# EAGLE board Granny Safe2 (EAGLE 8.4.0)
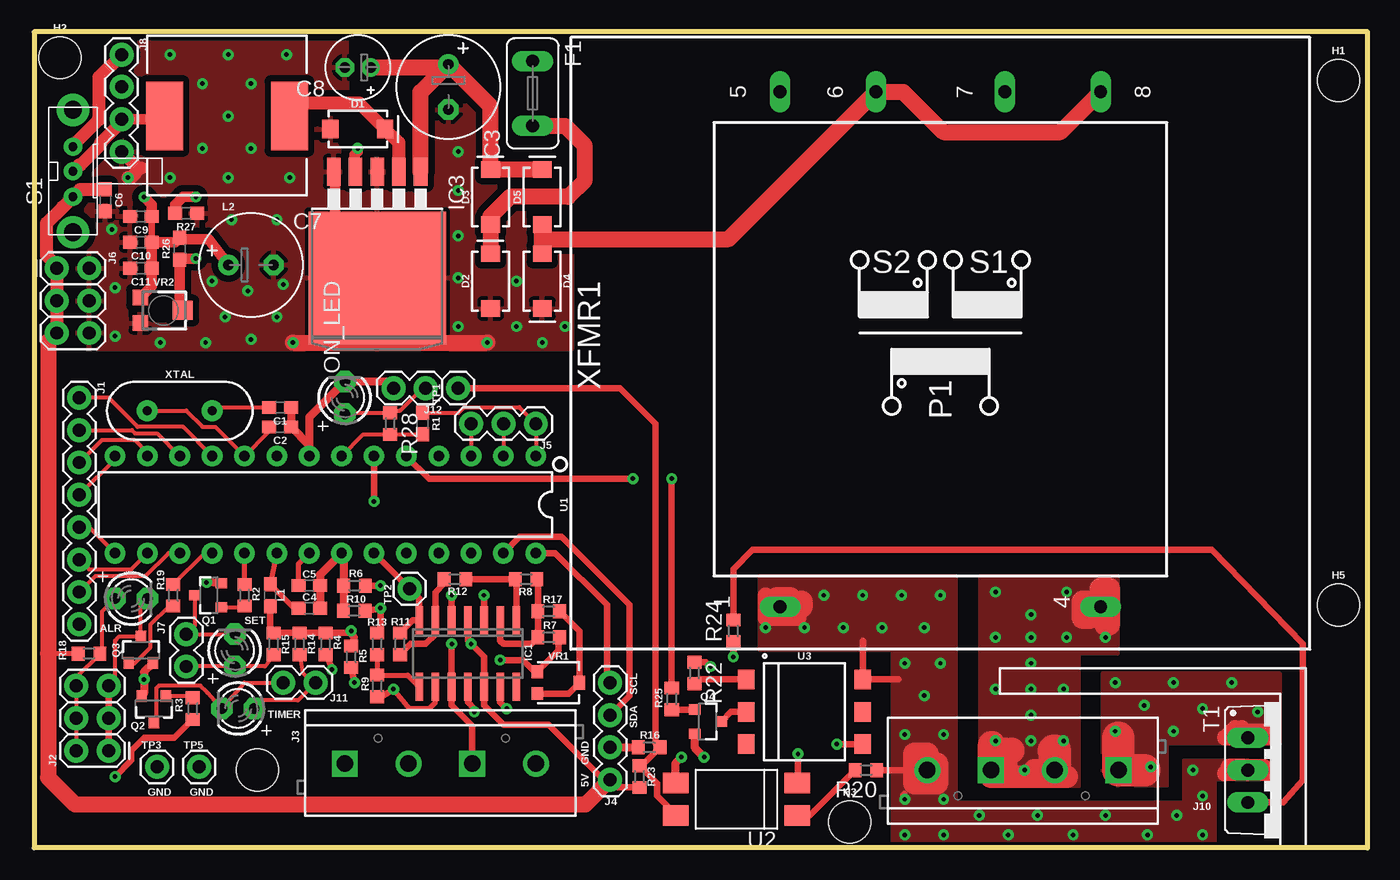
[diagram p0: board, top side]
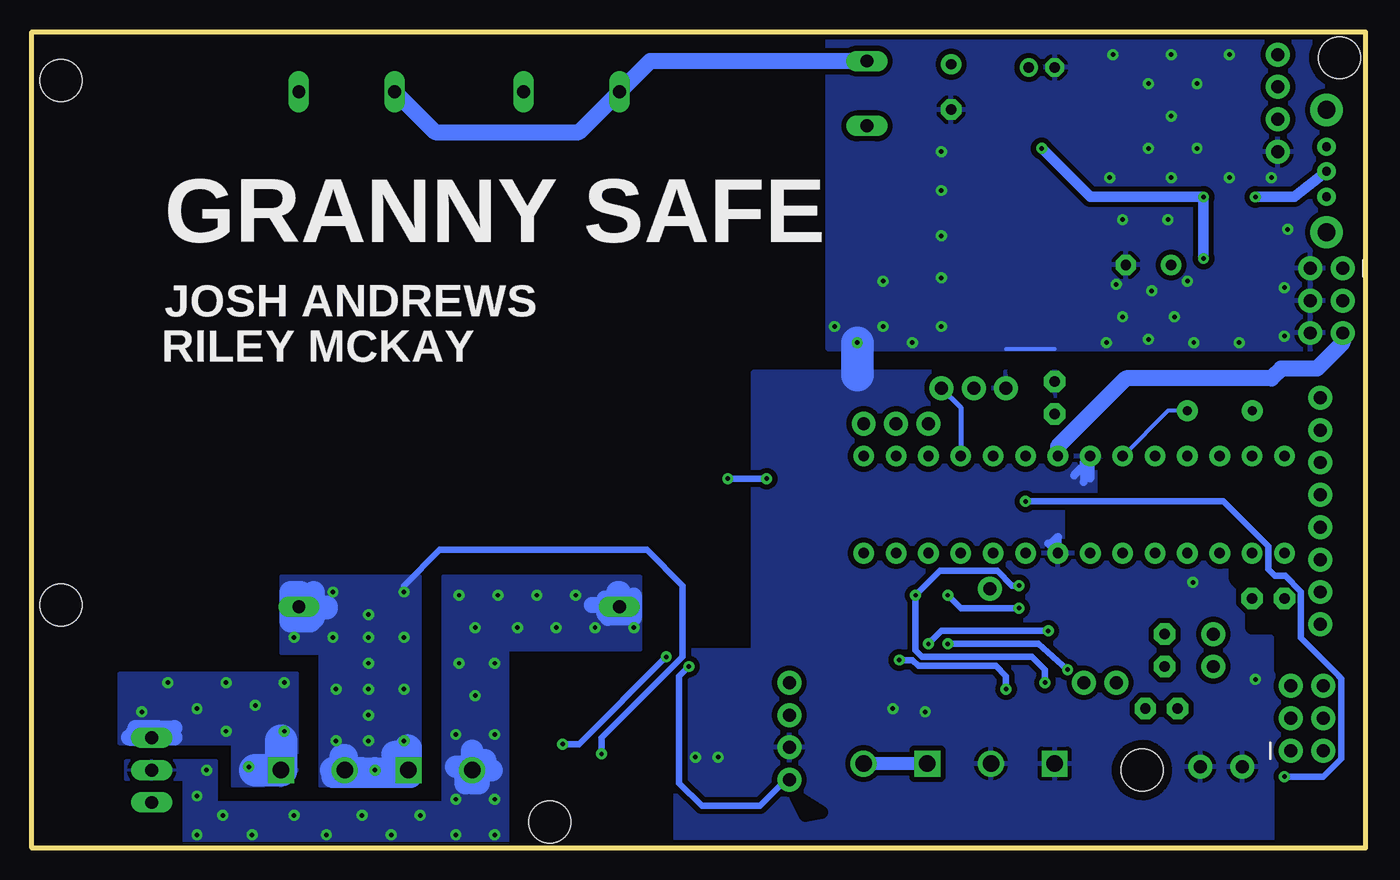
[diagram p1: board, bottom side, seen from below]

Size 104.65 x 64.01 mm. Coordinates in mm from the lower left corner, seen from the top.
Outline: 0,64.01 0,0 104.65,0 104.65,64.01 0,64.01
Copper layers (1*16): Top 0.035mm / dielectric 1.5mm / Bottom 0.035mm
Design rules "SparkFun *": minimum track width 8mil, minimum drill 20mil, track to track 8mil, track to pad 8mil, pad to pad 8mil, via to via 8mil, smd to smd 8mil, copper to edge 10mil, drill to drill 8mil, minimum pad ring 12mil, minimum via ring 10mil, stop-mask expansion 4mil, vias tented up to drill 15mil, thermal gap 12mil
tRestrict: area 25.4,56.4 to 29.2,60.5; area 25.4,61.7 to 30.5,63.2; area 9.4,41.9 to 10.4,45.5; area 8.4,48.5 to 8.6,48.8; area 32,59.2 to 33,59.9; area 26.4,54.9 to 27.4,55.1; area 24.4,55.1 to 24.6,56.6
bRestrict: area 27.7,17.8 to 28.2,18; area 28.4,17.8 to 32.3,18; area 32.3,17 to 34.5,20.3; area 9.4,24.4 to 22.9,26.4; area 4.8,23.4 to 20.3,30; area 14.5,31.2 to 21.6,35.6; area 24.9,32 to 31,37.3; area 20.1,34.5 to 23.1,37.3; area 6.1,3 to 6.6,4.8; area 3.8,13.5 to 8.9,18.3; area 7.4,20.3 to 10.2,22.6; area 42.7,2.5 to 44.7,4.1; 1 more areas

## Footprints (pad centres in the part's own frame; a part is rotated, then mirrored left to right if it is on the bottom)
LED3MM = drill 0.813 pad 1.676 octagon: A -1.27,0; K 1.27,0
0603 = smd 1.1 x 1: 1 -0.85,0; 2 0.85,0
E3,5-8 = drill 0.813 pad 1.6: + -1.778,0 | drill 0.813 pad 1.6 octagon: - 1.778,0
E2-5 = drill 0.813 pad 1.422: + -1.016,0 | drill 0.813 pad 1.422 octagon: - 1.016,0
SMA-DIODE = smd 1.27 x 1.47: A -2.15,0; C 2.15,0
TE5 = drill 1.016 long: 1 -2.54,0; 2 2.54,0
STAND-OFF = hole 3.302: 0,0
SO14 = smd 0.6 x 2.2: 1 -3.81,-2.6; 2 -2.54,-2.6; 3 -1.27,-2.6; 4 0,-2.6; 5 1.27,-2.6; 6 2.54,-2.6; 7 3.81,-2.6; 8 3.81,2.6; 9 2.54,2.6; 10 1.27,2.6; 11 0,2.6; 12 -1.27,2.6; 13 -2.54,2.6; 14 -3.81,2.6
TO263-5 = smd 1.067 x 2.159: 1 -3.404,-5.791; 2 -1.702,-5.791; 3 0,-5.791; 4 1.702,-5.791; 5 3.404,-5.791 | smd 10.8 x 10.41: 6 0,2.54
1X08 = drill 1.016 pad 1.88: 1 0,0; 2 2.54,0; 3 5.08,0; 4 7.62,0; 5 10.16,0; 6 12.7,0; 7 15.24,0; 8 17.78,0
2X3 = drill 1.016 pad 1.88: 1 0,0; 2 0,2.54; 3 2.54,0; 4 2.54,2.54; 5 5.08,0; 6 5.08,2.54
SCREWTERMINAL-5MM-2 = drill 1.3 pad 2.032 square: 1 0,0; 3 10,0 | drill 1.3 pad 2.032: 2 5,0; 4 15,0
1X04 = drill 1.016 pad 1.88: 1 0,0; 2 2.54,0; 3 5.08,0; 4 7.62,0
1X03 = drill 1.016 pad 1.88: 1 0,0; 2 2.54,0; 3 5.08,0
1X02 = drill 1.016 pad 1.88: 1 0,0; 2 2.54,0
CR75 = smd 2.9 x 5.4: P$1 -4.8,0; P$2 5,0
SOT23-3 = smd 0.8 x 0.9: 1 -0.95,-1; 2 0.95,-1; 3 0,1.1
R0603 = smd 1 x 1.1: 1 -0.85,0; 2 0.85,0
EG1213 = drill 0.7 pad 1.422: 1 -2,0; 2 0,0; 3 1.9,0 | drill 1.4 pad 2.54: MT1 -4.8,0; MT2 4.8,0
TO220BV = drill 1.016 long: G 2.54,-2.54; T1 -2.54,-2.54; T2 0,-2.54
1X01 = drill 1.016 pad 1.88: 1 0,0
DIP28 = drill 0.813 pad 1.626: 1 -16.51,-3.81; 2 -13.97,-3.81; 3 -11.43,-3.81; 4 -8.89,-3.81; 5 -6.35,-3.81; 6 -3.81,-3.81; 7 -1.27,-3.81; 8 1.27,-3.81; 9 3.81,-3.81; 10 6.35,-3.81; 11 8.89,-3.81; 12 11.43,-3.81; 13 13.97,-3.81; 14 16.51,-3.81; 15 16.51,3.81; 16 13.97,3.81; 17 11.43,3.81; 18 8.89,3.81; 19 6.35,3.81; 20 3.81,3.81; 21 1.27,3.81; 22 -1.27,3.81; 23 -3.81,3.81; 24 -6.35,3.81; 25 -8.89,3.81; 26 -11.43,3.81; 27 -13.97,3.81; 28 -16.51,3.81
DIL4-SMD = smd 1.6 x 2: 1 -1.27,-4.77; 2 1.27,-4.77; 3 1.27,4.77; 4 -1.27,4.77
DIP8SMD = smd 1.524 x 1.27: 1 -2.54,-4.572; 2 0,-4.572; 3 2.54,-4.572; 4 2.54,4.572; 5 0,4.572; 6 -2.54,4.572
TRIMPOT-SMD-3MM-CLOSED = smd 1 x 0.9: 1 -0.85,-1.65; 3 0.85,-1.65 | smd 1.1 x 0.9: 2 0,1.65
TRIMPOT-SMD-TC33X = smd 1.2 x 1.2: 1 -1,-1.825; 3 1,-1.825 | smd 1.5 x 1.6: 2 0,1.5
EE20-2 = drill 1.016 long: 1 -17.653,12.573; 4 -17.653,-12.573; 5 22.733,12.573; 6 22.733,5.055; 7 22.733,-5.055; 8 22.733,-12.573
HC49US = drill 0.7 pad 1.651: 1 -2.54,0; 2 2.54,0

## Placement (x,y rotation side)
ALR_LED  [LED3MM]  7.62,19.56 0 top
C1  22pF  [0603]  19.3,34.54 180 top
C2  22pF  [0603]  19.3,33.02 180 top
C3  470u  [E3,5-8]  32.51,59.69 270 top
C4  0.1uF  [0603]  21.59,18.8 0 top
C5  0.1uF  [0603]  21.59,20.57 0 top
C6  0.1uF  [0603]  5.59,50.8 270 top
C7  470u  [E3,5-8]  17.02,45.72 0 top
C8  100u  [E2-5]  25.4,61.21 180 top
C9  0.1uF  [0603]  8.38,49.53 180 top
C10  100pF  [0603]  8.38,47.5 180 top
C11  1nF  [0603]  8.38,45.47 180 top
D1  [SMA-DIODE]  25.4,56.39 0 top
D2  [SMA-DIODE]  35.81,44.45 90 top
D3  [SMA-DIODE]  35.81,51.05 90 top
D4  [SMA-DIODE]  39.88,44.45 270 top
D5  [SMA-DIODE]  39.88,51.05 90 top
F1  1.5A  [TE5]  39.12,59.18 270 top
H1  STAND-OFF  [STAND-OFF]  102.36,60.2 0 top
H2  STAND-OFF  [STAND-OFF]  2.03,61.98 0 top
H3  STAND-OFF  [STAND-OFF]  64.01,2.03 0 top
H4  STAND-OFF  [STAND-OFF]  17.53,6.1 0 top
H5  STAND-OFF  [STAND-OFF]  102.36,19.05 0 top
IC1  MCP604SL  [SO14]  34.04,15.24 180 top
IC3  [TO263-5]  26.92,47.24 180 top
J1  3x4 Keypad  [1X08]  3.56,35.31 270 top
J2  FEMALE 2x3  [2X3]  5.84,7.62 90 top
J3  SCREW-4  [SCREWTERMINAL-5MM-2]  24.38,6.6 0 top
J4  i2c_16x2  [1X04]  45.21,5.33 90 top
J5  [1X03]  39.37,33.27 180 top
J6  FEMALE 2x3  [2X3]  1.78,45.47 270 top
J7  [1X02]  11.94,14.22 90 top
J8  RES JUMPER  [1X04]  6.86,62.23 270 top
J10  SCREW-4  [SCREWTERMINAL-5MM-2]  85.09,6.1 180 top
J11  [1X02]  22.1,12.95 180 top
J12  [1X02]  30.73,36.07 180 top
L1  10uH  [0603]  18.54,19.81 90 top
L2  INDUCTOR  [CR75]  15.24,57.4 180 top
ON_LED  [LED3MM]  24.38,35.31 90 top
Q1  [SOT23-3]  13.72,19.81 90 top
Q2  [SOT23-3]  9.4,10.92 180 top
Q3  [SOT23-3]  8.38,15.49 0 top
Q4  2N3904  [SOT23-3]  52.83,9.91 270 top
R1  10k  [0603]  30.48,33.27 270 top
R2  2k  [R0603]  16.51,19.81 270 top
R3  2k  [R0603]  12.45,10.92 90 top
R4  2.4k  [R0603]  22.86,16 90 top
R5  2.4k  [R0603]  24.89,14.99 90 top
R6  100  [R0603]  25.15,20.57 0 top
R7  10k  [R0603]  40.39,16.51 180 top
R8  20k  [R0603]  38.61,21.08 180 top
R9  20k  [R0603]  26.92,12.7 270 top
R10  15k  [R0603]  25.12,18.59 0 top
R11  15k  [R0603]  28.7,16 90 top
R12  3k  [R0603]  33.02,21.08 180 top
R13  3k  [R0603]  26.92,16 90 top
R14  150  [R0603]  20.83,16 90 top
R15  150  [R0603]  18.8,16 90 top
R16  1M  [R0603]  48.26,7.87 0 top
R17  5k  [R0603]  40.39,18.54 0 top
R18  150  [R0603]  4.32,15.24 180 top
R19  2k  [R0603]  10.92,19.81 270 top
R20  10k  [R0603]  65.28,6.1 180 top
R22  220  [R0603]  51.82,13.72 270 top
R23  10k  [R0603]  47.5,5.59 270 top
R24  180  [R0603]  54.86,17.02 90 top
R25  2k  [R0603]  50.04,11.68 270 top
R26  3.3k  [0603]  11.43,46.99 90 top
R27  1k  [0603]  11.94,49.78 180 top
R28  150  [R0603]  27.94,33.27 270 top
S1  EG1213  [EG1213]  3.05,53.09 90 top
SET_LED  [LED3MM]  15.75,15.49 90 top
T1  BT137  [TO220BV]  97.79,6.1 270 top
TIM_LED  [LED3MM]  16,10.92 180 top
TP1  [1X01]  33.27,36.07 90 top
TP2  [1X01]  29.46,20.32 90 top
TP3  [1X01]  9.65,6.35 0 top
TP5  [1X01]  12.95,6.35 0 top
U1  328P  [DIP28]  22.86,26.92 180 top
U2  SFH6206  [DIL4-SMD]  55.12,3.81 90 top
U3  MOC3051  [DIP8SMD]  60.45,10.67 270 top
VR1  10k  [TRIMPOT-SMD-3MM-CLOSED]  41.15,12.95 270 top
VR2  10k  [TRIMPOT-SMD-TC33X]  10.16,42.16 270 top
XFMR1  EE20-2  [EE20-2]  71.12,36.58 90 top
XTAL  16MHz  [HC49US]  11.43,34.29 0 top

## Library data of the parts
ALR_LED C3 C7 C8 ON_LED R2 R3 R14 R15 R18-R20 R22-R25 R28 S1 SET_LED TIM_LED = adafruit
C1 C2 = SparkFun-Capacitors; PROD_ID: CAP-07876
C4-C6 = SparkFun-Capacitors; PROD_ID: CAP-00810
C9 = SparkFun-Capacitors; PROD_ID: CAP-08604
C10 = SparkFun-Capacitors; PROD_ID: CAP-07883
C11 = SparkFun-Capacitors; PROD_ID: CAP-07886
D1-D5 = SparkFun-DiscreteSemi; PROD_ID: DIO-09886
F1 = fuse; OC_FARNELL: unknown; OC_NEWARK: unknown
H1-H5 = SparkFun-Hardware
IC1 IC3 = linear
J1 = SparkFun-Connectors; PROD_ID: CONN-08438
J2 J6 = SparkFun-Connectors; PROD_ID: CONN-11566
J3 J10 L2 T1 U3 XFMR1 = ece
J4 J8 = SparkFun-Connectors; PROD_ID: CONN-09696
J5 J7 J11 J12 TP1-TP3 TP5 = SparkFun-Connectors
L1 = SparkFun-Coils; PROD_ID: NDUC-07874
Q1-Q4 = SparkFun-DiscreteSemi; PROD_ID: TRANS-09116
R1 = SparkFun-Resistors; PROD_ID: RES-00824
R4-R13 R16 R17 = resistor
R26 = SparkFun-Resistors; PROD_ID: RES-07851
R27 = SparkFun-Resistors; PROD_ID: RES-07856
U1 = SparkFun-IC-Microcontroller; PROD_ID: IC-09136
U2 = optocoupler; MF: VISHAY/TELEFUNKEN; MPN: SFH6206-3; OC_FARNELL: 1469585; OC_NEWARK: 58K2214
VR1 = SparkFun-Resistors; PROD_ID: RES-09285
VR2 = SparkFun-Resistors; PROD_ID: RES-12428
XTAL = SparkFun-Clocks; PROD_ID: XTAL-08181; SF_ID: COM-00536

## Nets
5V: C6.1 IC1.4 IC1.12 J4.1 J6.1 J6.3 J6.5 L1.1 R1.2 R4.2 R5.2 R14.2 R15.2 R18.2 R22.1 R23.2 R28.2 S1.1 U1.7
ADC0: IC1.7 R11.2 TP2.1 U1.23
ALR: R19.1 U1.18
GATE: R25.1 U1.5
GND: C1.1 C2.1 C3.- C4.2 C5.2 C6.2 C7.- C8.- C9.2 C10.2 C11.2 D1.A D2.A D4.C IC1.11 IC1.13 IC3.3 IC3.5 IC3.6 J3.1 J3.2 J4.2 J6.2 J6.4 J6.6 J8.4 J12.2 ON_LED.K Q1.2 Q2.2 Q3.2 Q4.2 R6.1 R10.1 R16.1 R27.1 TP3.1 TP5.1 U1.8 U1.22 U2.3 VR2.3
LINE: J10.4 R20.1 T1.T2 U3.6 XFMR1.1
N$1: C1.2 U1.9 XTAL.2
N$2: C2.2 U1.10 XTAL.1
N$3: J1.7 U1.17
N$4: J8.1 S1.3
N$5: C5.1 U1.21
N$6: J1.6 U1.16
N$7: J1.5 U1.15
N$8: J1.4 U1.14
N$9: J1.3 U1.13
N$10: J1.2 U1.12
N$11: J1.1 U1.11
N$12: Q1.1 R2.2
N$13: IC1.10 J3.3 J3.4 R4.1
N$14: Q2.1 R3.2
N$15: IC1.3 R5.1 R6.2
N$16: IC1.1 R8.2 R12.1
N$17: J7.1 R15.1 SET_LED.A
N$18: J11.1 R14.1 TIM_LED.A
N$19: J11.2 Q2.3 TIM_LED.K
N$20: J7.2 Q1.3 SET_LED.K
N$21: R17.2 VR1.2 VR1.3
N$22: D2.C D3.A F1.2
N$23: ALR_LED.K J2.1 J2.3 J2.5 Q3.3
N$24: IC1.2 R7.2 R8.1 R17.1
N$25: IC1.8 R9.1 R13.1
N$26: IC1.9 R7.1 R9.2 VR1.1
N$27: IC1.5 R10.2 R13.2
N$28: IC1.6 R11.1 R12.2
N$29: R20.2 U2.1
N$30: R24.2 T1.G
N$31: R22.2 U3.1
N$32: R24.1 U3.4
N$33: IC3.4 R26.1 R27.2 VR2.2
N$34: Q4.3 U3.2
N$35: Q4.1 R25.2
N$36: J12.1 ON_LED.A R28.1
N$37: F1.1 XFMR1.5 XFMR1.7
N$38: C7.+ C9.1 C10.1 C11.1 J8.3 L2.P$2 R26.2 S1.2 VR2.1
N$39: ALR_LED.A J2.2 J2.4 J2.6 R18.1
N$40: Q3.1 R19.2
N$41: D4.A D5.A XFMR1.6 XFMR1.8
N$43: C4.1 L1.2 U1.20
N$46: D1.C IC3.2 L2.P$1
N$51: C3.+ C8.+ D3.C D5.C IC3.1
NEUT: J10.2 J10.3 U2.2 XFMR1.4
PWR: J10.1 T1.T1
RST: J5.1 R1.1 U1.1
RX: J5.2 U1.2
SCL: J4.4 U1.28
SDA: J4.3 U1.27
SET: R2.1 U1.19
T_EN: R3.1 U1.6
TX: J5.3 U1.3
ZERO: R16.2 R23.1 TP1.1 U1.4 U2.4

## Tracks (layer width: path | path; a pad name or v marks a point on that pad's centre or on a via)
5V  (via drill 0.35)
  Top 0.305: U1.7 25.82,32.42 R28.2 R1.2
  Top 0.406: R18.2 1.09,15.24
  Top 0.508: R23.2 45.81,4.74 J4.1 44.7,5.33 40.39,9.65 36.83,9.65 35.31,11.18 IC1.12 35.31,14.99 v34.29,16 34.04,16.26 IC1.4 | L1.1 18.54,17.36 R15.2 R14.2 R4.2 24.73,16.85 v24.89,17.02 24.89,16.76 25.15,16.51 R5.2 | v53.09,14.22 52.74,14.57 R22.1
  Top 1.016: 0.96,46.74 0.96,49 2.23,50.27 S1.1 3.61,51.65 C6.1 | 0.96,46.74 | 0.96,46.74 0.96,46.48 1.78,45.67 J6.1 J6.3 J6.5
  Top 1.27: J6.5 1.09,39.7 1.09,15.24 1.09,5.51 3.23,3.38 43.26,3.38 J4.1
  Bottom 0.508: J4.1 45.47,5.33 47.5,3.3 52.07,3.3 53.85,5.08 53.85,13.46 v53.09,14.22 | v34.29,16 33.27,17.02 v24.89,17.02
  Bottom 1.27: U1.7 24.13,31.5 18.8,36.83 7.37,36.83 6.6,37.59 3.81,37.59 1.78,39.62 J6.5
ADC0
  Top 0.508: R11.2 29.69,17.84 IC1.7 30.23,19.56 TP2.1 U1.23
ALR
  Top 0.305: R19.1 13.37,23.11 U1.18
GATE  (via drill 0.35)
  Top 0.508: R25.1 50.04,27.43 50.04,27.69 v50.04,28.96 | U1.5 30.99,28.96 v46.99,28.96
  Bottom 0.508: v46.99,28.96 v50.04,28.96
GND  (via drill 0.35)
  Top 0.406: 51.77,8.89 Q4.2
  Top 0.508: v37.08,10.92 36.58,11.43 IC1.13 | IC1.11 34.04,11.43 34.54,10.92 v34.54,10.67
  Top 0.61: Q2.2 8.64,12.11 v8.64,13.21 8.64,13.8 Q3.2 | C4.2 C5.2 22.44,21.42 U1.22 24.3,22.95 R6.1 R10.1 | C1.1 C2.1 21.59,31.58 U1.8 21.59,33.78 ON_LED.K 27.69,36.58 J12.2 | U2.3 50.35,6.66 v50.8,7.11 | Q4.2 51.83,7.86 v52.58,7.11 | J4.2 R16.1 | Q1.2 14.63,20.75 v13.54,20.83
  Top 0.813: IC3.5 23.62,52.93 23.62,48.01 IC3.6
  Top 1.016: J8.4 8.13,53.34 8.38,53.34 7.62,52.58 v7.37,52.58
  Top 1.27: v20.32,39.62 v35.56,39.62
  Bottom 0.305: 24.38,39.12 28.19,39.12
  Bottom 0.61: 21.59,30.48 U1.8 22.1,30.23 22.1,28.7 | 21.59,30.48 21.59,28.96 | 21.59,30.48 22.86,29.21 | U1.22 24.13,24.38 24.64,23.88 24.64,23.62 U1.22 | U1.22 24.89,23.88
  Bottom 2.54: v39.88,39.62 39.88,37.08
  other vias: 10.67,62.23 15.24,62.23 19.81,62.23 13.21,59.94 17.02,59.94 17.02,54.86 13.21,54.86 10.67,52.58 15.24,52.58 20.07,52.58 15.24,57.4 33.27,54.61 33.27,51.56 33.27,48.01 33.27,44.7 33.27,40.89 37.85,44.45 37.85,40.89 41.66,40.89 6.1,48.51 6.35,43.94 6.35,40.13 9.91,39.62 13.46,39.62 14.99,41.66 16.76,43.69 13.97,44.45 19.56,44.2 15.49,49.28 19.05,49.28 19.05,41.66 17.02,39.88
  pour Top (isolate 0.508): 0,64.01 42.16,64.01 42.16,39.12 0,39.12
  pour Bottom (isolate 0.406): 0,64.52 0,39.12 42.16,39.12 42.16,64.52
  pour Bottom (isolate 0.406): -1.52,37.34 -1.52,-2.03 54.1,-2.03 54.1,15.49 48.01,15.49 48.01,37.34
LINE  (via drill 0.35)
  Top 0.406: 68.16,4.15 68.33,4.32 v68.33,3.81
  Top 0.508: 65.02,16.26 U3.6 67.82,13.21 | R20.1 J10.4
  Top 1.27: XFMR1.1 58.29,18.92 57.4,19.81 57.4,18.03 59.94,18.03 59.44,18.54 59.44,19.81 58.17,19.81 57.91,19.56 57.91,18.8 | 93.47,5.84 97.03,5.84 96.52,6.35 95,6.35 | T1.T2 95,6.35 | 95,6.35 93.73,6.35
  Top 1.778: XFMR1.1 60.2,18.92 60.2,19.3 | J10.4 70.09,7.37 69.09,7.37 69.09,5.08 70.87,5.08 70.87,6.6
  Bottom 1.27: XFMR1.1 58.29,18.92 57.4,19.81 57.4,18.03 59.44,18.03 59.69,18.29 59.69,19.56 59.18,19.56 XFMR1.1 | 60.71,19.05 58.67,19.05 XFMR1.1
  Bottom 1.778: J10.4 70.09,7.62 70.1,7.62 | J10.4 68.58,6.1 | J10.4 70.09,6.35 71.37,6.35 | J10.4 70.61,6.1 70.61,5.08 | J10.4 70.09,5.08 69.6,5.08 | J10.4 69.09,6.1 69.09,6.86 | XFMR1.1 58.55,20.07 58.67,20.07
  other vias: 61.98,19.81 65.02,19.81 68.07,19.81 63.5,17.27 71.12,19.81 69.85,17.27 66.55,17.27 60.45,17.27 57.4,17.27 71.12,14.48 69.85,11.94 71.37,8.89 68.33,8.89 71.37,3.81 68.33,1.02 74.17,2.54 71.37,1.02 78.74,2.54 76.45,1.02 81.53,1.02 84.07,2.54 87.38,1.02 89.66,2.54 91.69,1.02 68.33,14.48 91.69,4.06 90.93,6.1
  pour Top: 56.9,21.34 56.9,15.49 67.31,15.49 67.31,0 92.71,0 92.71,5.33 97.54,5.33 97.54,6.86 90.17,6.86 90.17,3.56 72.39,3.56 72.39,21.34
  pour Bottom: 56.9,21.34 56.9,15.49 67.31,15.49 67.31,0 92.71,0 92.71,5.33 97.28,5.33 97.28,6.86 90.17,6.86 90.17,3.56 72.39,3.56 72.39,21.34
N$1
  Top 0.305: XTAL.2 14.22,34.54 C1.2
  Bottom 0.305: XTAL.2 15.49,34.29 U1.9
N$2
  Top 0.305: C2.2 18.87,33.36 | XTAL.1 11.94,34.29 13.21,33.02 14.22,33.02 U1.10 18.45,32.68 C2.2 | 18.71,32.93 C2.2
N$3
  Top 0.305: J1.7 4.83,21.34 8.76,21.34 10.54,23.11 U1.17
N$4
  Top 1.016: J8.1 5.08,60.45 5.08,57.15 5.03,57.1 5.03,57.06 3.05,55.08 S1.3
N$5
  Top 0.406: C5.1 20.74,22.26 U1.21
N$6
  Top 0.305: J1.6 4.32,21.84 7.62,21.84 U1.16
N$7
  Top 0.305: J1.5 4.32,25.15 U1.15
N$8
  Top 0.305: U1.14 6.35,30.48 J1.4
N$9
  Top 0.305: J1.3 5.33,32 7.87,32 8.89,30.99 U1.13
N$10
  Top 0.305: J1.2 7.66,32.77 7.92,32.51 9.65,32.51 U1.12
N$11
  Top 0.305: U1.11 11.68,33.02 8.13,33.02 5.84,35.31 J1.1
N$12
  Top 0.305: Q1.1 16.41,18.86 R2.2
N$13  (via drill 0.35)
  Top 0.508: J3.3 34.38,9.56 32.77,11.18 IC1.10 v32.77,16 | R4.1 23.37,14.14 v23.37,13.97
  Bottom 0.508: v23.37,13.97 25.65,16 v32.77,16
  Bottom 1.016: J3.3 J3.4
N$14
  Top 0.305: Q2.1 12.3,11.92 R3.2
N$15  (via drill 0.35)
  Top 0.508: R5.1 v25.15,12.95 | R6.2 v27.18,20.57 | v35.31,19.81 IC1.3
  Bottom 0.508: v27.18,20.57 27.74,20.57 28.88,21.72 33.4,21.72 v35.31,19.81 35.31,15.49 34.8,14.99 26.16,14.99 25.15,13.97 v25.15,12.95
N$16
  Top 0.508: R12.1 R8.2 37.85,20.74 IC1.1
N$17
  Top 0.305: R15.1 18.12,14.22 SET_LED.A J7.1
N$18
  Top 0.305: TIM_LED.A 17.65,11.56 20.7,11.56 21.97,12.83 | 21.97,12.83 J11.1 | R14.1 21.08,13.72 21.97,12.83
N$19
  Top 0.305: Q2.3 9.59,10.02 9.59,12.52 9.8,12.73 13.04,12.73 13.58,12.19 TIM_LED.K 16.51,12.95 J11.2
N$20
  Top 0.305: Q1.3 12.62,17.44 J7.2 SET_LED.K
N$21
  Top 0.508: VR1.3 41.95,12.1 VR1.2 42.8,16.98 R17.2
N$22
  Top 1.27: F1.2 41.66,56.64 43.18,55.12 43.18,52.32 41.91,51.05 37.34,51.05 35.81,49.53 D3.A D2.C
N$23
  Top 0.305: ALR_LED.K 8.38,19.05 Q3.3 6.69,16.59 6.35,16.26 6.35,13.21 J2.5
  Top 0.508: J2.5 J2.3 J2.1
N$24
  Top 0.508: IC1.2 36.58,16.26 36.83,16 39.03,16 R7.2 R17.1 39.54,20.75 R8.1
N$25
  Top 0.406: R13.1 R9.1 29.32,13.55 IC1.8
N$26  (via drill 0.35)
  Top 0.406: v28.19,12.45 29.46,10.92 30.99,10.92 31.5,11.43 IC1.9
  Top 0.508: R7.1 41.15,16.42 41.15,15.49 39.5,13.84 VR1.1 39.28,13.8 38.35,14.73 v36.58,14.73 | R9.2 27.27,11.85 v28.19,12.45
  Bottom 0.508: v36.58,14.73 35.55,14.73 35.09,14.28 29.01,14.28 28.19,13.46 v28.19,12.45
N$27  (via drill 0.35)
  Top 0.508: R10.2 26,18.54 v27.18,18.8 27.18,17.11 R13.2 | v32.77,19.81 IC1.5
  Bottom 0.508: v27.18,18.8 31.75,18.8 v32.77,19.81
N$28
  Top 0.508: R12.2 32.17,20.74 31.5,20.07 IC1.6 31.5,16.76 30.73,16 29.55,16 R11.1
N$29
  Top 0.508: U2.1 60.87,2.54 R20.2
N$30
  Top 0.508: T1.G 98.04,3.56 99.55,5.31 99.55,16 92.44,23.37 56.39,23.37 54.86,21.84 R24.2
N$31
  Top 0.508: R22.2 52.16,13.21 U3.1
N$32  (via drill 0.35)
  Top 0.508: 54.86,15.87 R24.1 v54.86,14.99 54.86,16.26 | v62.99,8.13 U3.4
  Bottom 0.508: v54.86,14.99 61.72,8.13 v62.99,8.13
N$33  (via drill 0.35)
  Top 0.813: VR2.2 11.43,42.39 R26.1 11.52,46.23 v12.7,46.23 | v25.4,54.86 25.4,54.61 25.15,54.36 25.15,53.11 IC3.4 | R27.2 11.09,50.46 11.68,51.05 v12.7,51.05
  Bottom 0.813: v25.4,54.86 21.59,51.05 v12.7,51.05 v12.7,46.23
N$34
  Top 0.508: Q4.3 54.69,10.67 U3.2
N$35
  Top 0.508: R25.2 51.81,10.83 Q4.1
N$36
  Top 0.305: ON_LED.A 24.47,34.12 R28.1 28.11,34.29 28.7,34.29 30.48,36.07 J12.1
N$37
  Bottom 1.27: XFMR1.7 73,56.13 61.72,56.13 XFMR1.5 56.13,61.72 F1.1
N$38  (via drill 0.35)
  Top 0.508: C10.1 C9.1
  Top 0.813: J8.3 9.99,57.15 L2.P$2 | v8.64,51.05 9.23,50.46 C9.1 | C7.+ 13.72,47.75 11.52,47.75 R26.2 11.09,47.5 C10.1 C11.1 9.23,44.06 VR2.1
  Top 1.016: S1.2 3.53,53.56 3.64,53.56 5.21,55.13 5.21,55.29 6.86,56.95 J8.3
  Bottom 0.813: S1.2 5.59,51.05 v8.64,51.05
N$39
  Top 0.305: J2.2 J2.4 J2.6 3.3,13.37 R18.1 5.33,15.41 5.33,18.54 ALR_LED.A
N$40
  Top 0.305: Q3.1 7.45,14.48 7.87,14.48 9.14,15.75 9.14,17.53 10.58,18.96 R19.2
N$41
  Top 1.27: XFMR1.8 80.52,56.13 71.37,56.13 68.2,59.31 XFMR1.6 54.51,47.75 39.88,47.75 | D4.A 39.88,47.75 | 39.88,47.75 D5.A
N$43
  Top 0.406: U1.20 L1.2 20.41,18.8 C4.1
N$46
  Top 1.016: IC3.2 28.63,55.31 D1.C 25.52,58.42 20.32,58.42 20.04,58.14 L2.P$1
N$51
  Top 1.27: D5.C D3.C 35.81,58.17 C3.+ | C8.+ 27.84,61.21 27.87,61.24 32.28,61.24 C3.+ | IC3.1 30.33,59.28 C3.+
NEUT  (via drill 0.35)
  Top 0.508: v59.94,7.37 59.94,5.64 U2.2
  Top 1.778: J10.2 78.49,6.1 78.49,5.84 78.74,5.84 78.74,5.59 | 78.74,5.59 81.03,5.59 | 78.74,5.59 75.09,5.59 J10.3 | XFMR1.4 83.69,20.32 84.33,20.32 84.33,17.53 84.07,17.53 84.07,19.3 82.3,19.3 82.3,18.03 82.8,18.03
  Top 2.032: J10.3 75.09,8.13 75.18,8.13 | 76.2,7.62 75.69,7.62 75.69,6.6 75.09,6.6 J10.3 | J10.3 75.09,5.84 | J10.3 76.2,6.1 76.2,7.62 | 76.2,7.62 76.71,7.62
  Top 2.54: J10.2 80.09,7.62 80.01,7.62
  Bottom 0.508: v75.44,20.07 75.44,20.57 72.64,23.37 56.39,23.37 53.59,20.57 53.59,14.99 59.94,8.64 v59.94,7.37
  Bottom 1.778: 81.03,6.1 81.03,5.59 74.93,5.59 74.93,7.87 75.09,7.87 | 81.53,18.8 81.53,18.92 XFMR1.4 83.57,18.92 83.57,20.07 84.33,20.07 84.33,17.78 82.8,17.78 82.8,18.03 82.55,18.03 82.55,20.07
  Bottom 2.032: J10.3 75.09,7.87 75.18,7.87 | J10.3 76.71,6.1 | J10.3 75.09,7.37 76.2,7.37 | 78.74,6.1 J10.2 | J10.2 80.09,7.11 80.26,7.11 | J10.2 81.03,6.1 | J10.2 v77.72,6.1 J10.3
  other vias: 75.44,8.38 80.77,8.38 78.23,10.41 75.44,12.45 80.77,12.45 78.23,14.48 78.23,12.45 75.44,16.51 78.23,18.29 84.07,16.51 81.03,20.07 78.23,16.51 81.03,16.51 78.23,8.38
  pour Top: 74.17,4.83 82.04,4.83 82.04,15.24 85.09,15.24 85.09,21.34 74.17,21.34
  pour Bottom: 74.17,21.34 74.17,4.83 82.04,4.83 82.04,15.24 85.09,15.24 85.09,21.34
PWR  (via drill 0.35)
  Top 1.27: T1.T1 93.47,8.64 94.23,9.4 94.74,9.4 95,9.14 96.77,9.14 97.03,8.89 97.03,8.64 T1.T1
  Top 2.54: 85.09,8.64 J10.1 87.12,6.1
  Bottom 1.27: 93.98,8.64 T1.T1 97.03,8.64 96.52,9.14 96.52,9.4 94.74,9.4 | 93.47,8.64 93.98,8.64 | 93.98,8.64 94.74,9.4 | 94.74,9.4 93.47,9.4
  Bottom 2.54: 85.09,8.38 J10.1 87.12,6.1
  other vias: 84.84,12.95 84.84,9.14 87.12,11.18 89.41,12.95 89.41,9.14 87.63,6.35 91.69,10.92 93.98,12.95 96.01,10.67
  pour Top: 83.82,4.83 83.82,13.72 97.79,13.72 97.79,8.13 88.9,8.13 88.9,4.83
  pour Bottom: 83.82,13.72 83.82,4.83 88.9,4.83 88.9,8.13 97.79,8.13 97.79,13.72
RST
  Top 0.305: U1.1 J5.1 38.07,34.57 33.75,34.57 33.31,34.12 R1.1
RX
  Top 0.305: J5.2 U1.2
SCL
  Top 0.508: J4.4 44.96,13.21 44.96,19.05 40.89,23.11 U1.28
SDA
  Top 0.508: J4.3 46.74,11.94 46.74,19.05 41.4,24.38 38.1,24.38 U1.27
SET
  Top 0.406: R2.1 U1.19
T_EN  (via drill 0.35)
  Top 0.508: R3.1 11.01,8.64 8.64,8.64 7.62,7.62 7.62,6.86 v6.35,5.59 | v26.67,27.18 U1.6
  Bottom 0.508: v6.35,5.59 3.3,5.59 1.91,6.98 1.91,13.28 2.03,13.41 2.03,13.46 5.05,16.49 5.05,20.1 6.3,21.34 7.11,21.34 7.62,21.84 7.62,23.64 11.16,27.18 v26.67,27.18
TX
  Top 0.305: J5.3 U1.3
ZERO
  Top 0.508: U2.4 50.35,2.63 48.89,4.09 48.89,5.04 R23.1 47.67,6.44 R16.2 48.77,8.22 48.77,33.27 45.97,36.07 TP1.1
  Bottom 0.406: U1.4 31.75,34.54 TP1.1

## Text on the board
bPlace: GRANNY SAFE | JOSH ANDREWS | RILEY MCKAY
tNames: R6 | R19 | R12 | R8 | R2 | R10 | R17 | R13 | R11 | ALR | SET | R7 | R18 | R15 | R14 | R4 | R5 | IC1 | SCL | R9 | SDA | R25 | R3 | TIMER | GND | R16 | 5V | R23 | GND | GND